# Altium PCB PCB_v1.PcbDoc (part 2 of 2)
Units mil, origin at the board's own origin, x right, y up, seen from the top; angles counter-clockwise.
Board outline 3011.81 x 2441 mil, 3 copper layers (Top Layer, Internal Plane 13, Bottom Layer); 107 components, 61 nets, 342 pads, 602 vias.
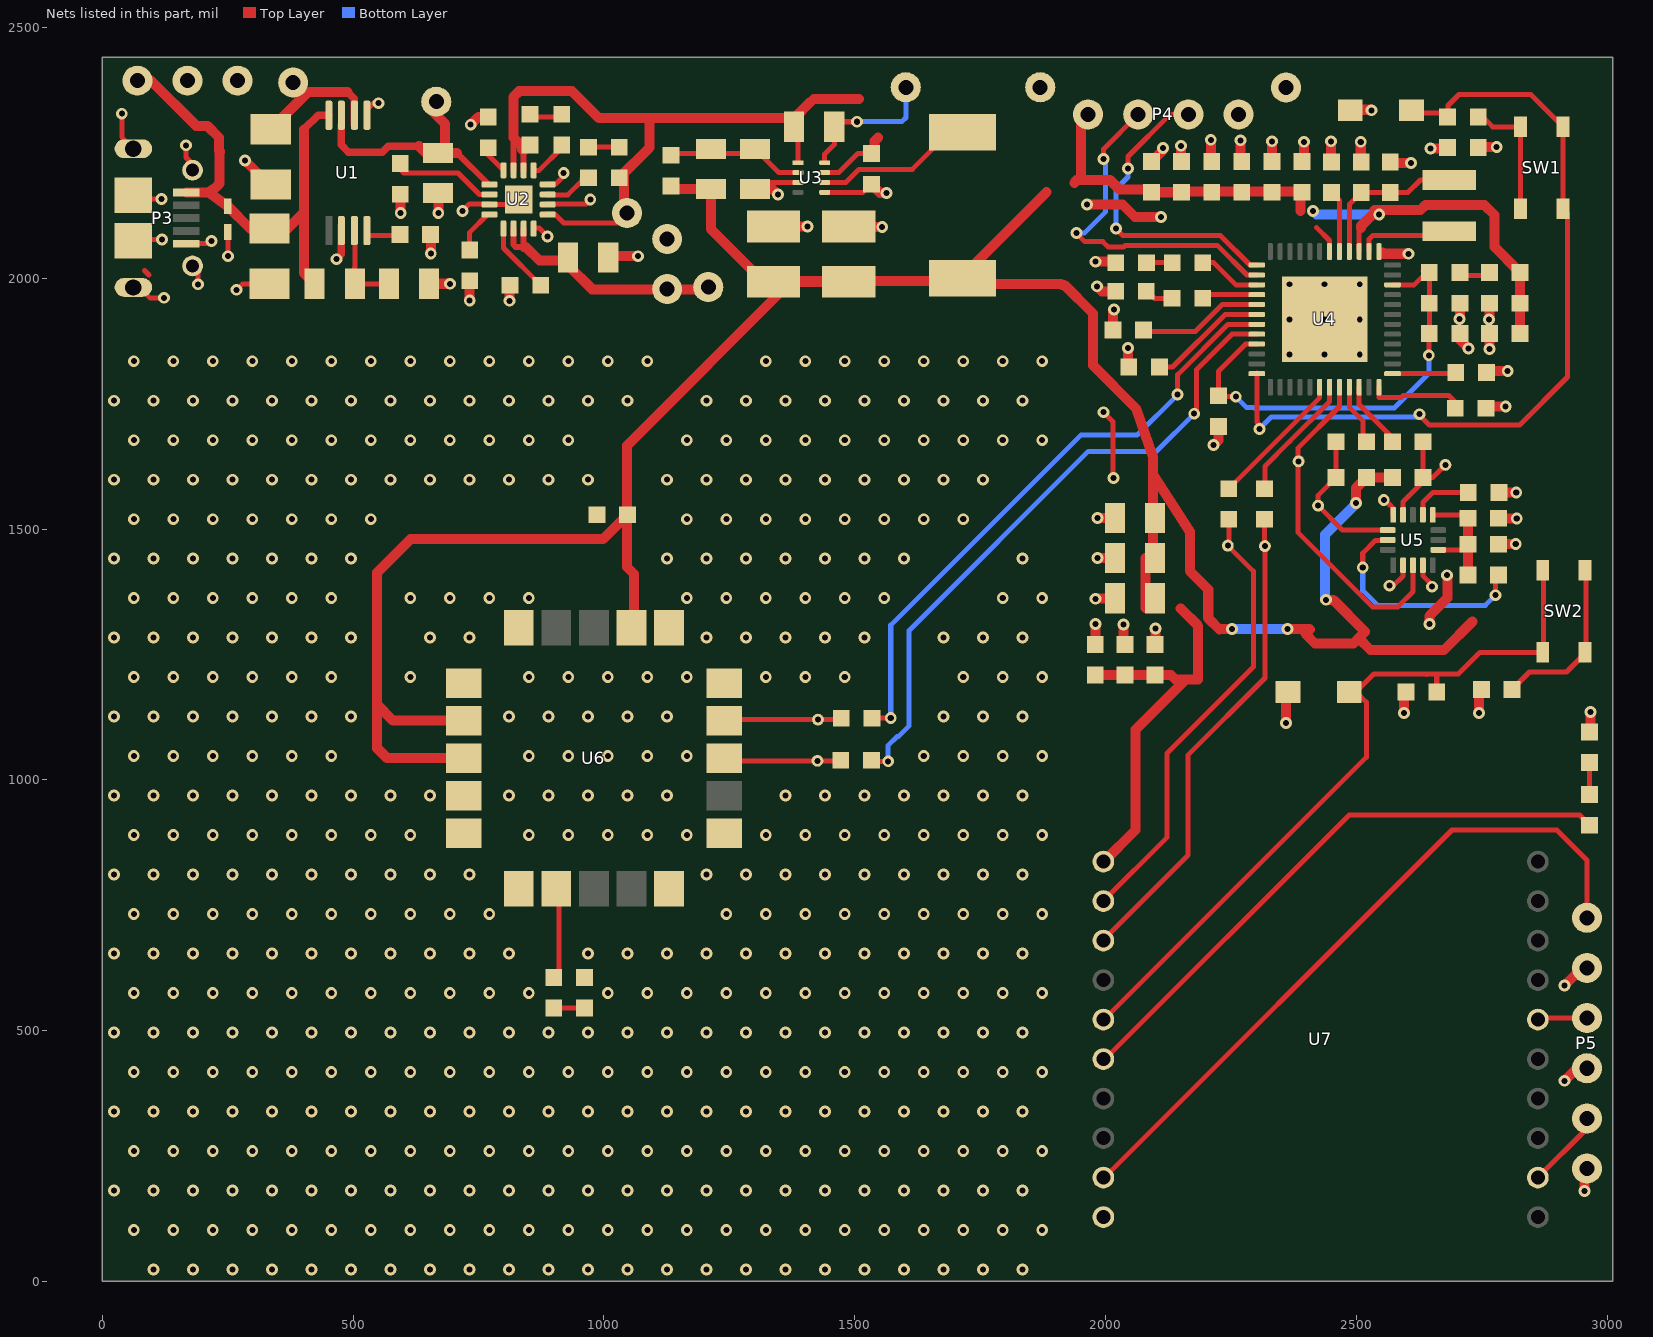
[diagram p3: the nets of this part, all layers, seen from the top]

## Part data
C1 C2: Package=1206, Supplier Part Number 1=311-1179-6-ND, Supplier 1=Digi-Key
C3 C4: Supplier Part Number 1=445-7617-1-ND, Supplier 1=Digi-Key
C5 C19 C25 C27: Supplier Part Number 1=399-3482-1-ND, Supplier 1=Digi-Key
C6: Supplier Part Number 1=490-1429-1-ND, Supplier 1=Digi-Key
C7 C8: Supplier Part Number 1=490-10560-1-ND, Supplier 1=Digi-Key
C9 C15 C21 C31: Supplier Part Number 1=490-10474-1-ND, Supplier 1=Digi-Key
C10 C20 C22: Supplier Part Number 1=490-6408-1-ND, Supplier 1=Digi-Key
C11 C12 C13 C14 C16 C17 C32: Supplier Part Number 1=490-8028-1-ND, Supplier 1=Digi-Key
C18 C23 C24 C26 C34: Supplier Part Number 1=490-8020-1-ND, Supplier 1=Digi-Key
C28 C29 C30: library part "0805C 47UF", Supplier Part Number 1=490-9949-1-ND, Supplier 1=Digi-Key
C33: Supplier Part Number 1=311-4039-1-ND, Supplier 1=Digi-Key
D1 D4: library part "0603 LEDR", Supplier Part Number 1=160-1181-6-ND, Supplier 1=Digi-Key
D2: library part "0603 LEDG", Supplier Part Number 1=160-1183-6-ND, Supplier 1=Digi-Key
D3 D5 D6: Supplier Part Number 1=160-1183-6-ND, Supplier 1=Digi-Key
E1: Supplier Part Number 1=1727-3838-1-ND, Supplier 1=Digi-Key
E2 E3: library part ESD_RESET, Supplier Part Number 1=F7701CT-ND, Supplier 1=Digi-Key
L1: Supplier Part Number 1=445-3878-1-ND, Supplier 1=Digi-Key
L2: Supplier Part Number 1=732-4484-1-ND, Supplier 1=Digi-Key
L3: Supplier Part Number 1=490-15954-1-ND, Supplier 1=Digi-Key
P1 P2: "Bat_connector"
P3: "USB - micro B USB 2.0 Receptacle Connector 5 Position Surface Mount, Right Angle; Through Hole", Package=None, Supplier Part Number 1=609-5379-6-ND, Availability=Unavailable, MF=Hirose, MP=ZX62D-B-5P8, Price=None, SnapEDA_Link=https://www.snapeda.com/parts/ZX62D-B-5P8/Hirose%20Electric%20Co%20Ltd/view-part/110243/?ref=snap, Supplier 1=Digi-Key
P4: library part 4pins_connector
R1 R2: Supplier Part Number 1=2019-RK73H2ATTD5101FCT-ND, Supplier 1=Digi-Key
R3 R6: Package=0603, Supplier Part Number 1=311-1.00KHRDKR-ND, Supplier 1=Digi-Key
R4 R5 R28 R31: Package=0603, Supplier Part Number 1=311-1.50KHRCT-ND, Supplier 1=Digi-Key
R7: Package=0603, Supplier Part Number 1=311-1.07KHRCT-ND, Supplier 1=Digi-Key
R8: Package=0603, Supplier Part Number 1=311-46.4KHRCT-ND, Supplier 1=Digi-Key
R9 R21 R22 R23: Package=0603, Supplier Part Number 1=311-10.0KHRCT-ND, Supplier 1=Digi-Key
R10 R12: Supplier Part Number 1=P100KCCT-ND, Supplier 1=Digi-Key
R11: Supplier Part Number 1=P453KCCT-ND, Supplier 1=Digi-Key
R13 R14: library part "0603R 3KR", Supplier Part Number 1=311-3.00KHRCT-ND, Supplier 1=Digi-Key
R15 R16 R17 R18: Package=0603
R19 R24 R25 R29 R30: Package=0603, Supplier Part Number 1=311-1.00HRCT-ND, Supplier 1=Digi-Key
R20 R32: Package=0603, Supplier Part Number 1=311-100HRCT-ND, Supplier 1=Digi-Key
R26 R27: Package=0603, Supplier Part Number 1=311-47.0HRDKR-ND, Supplier 1=Digi-Key
SW1 SW2: library part PTS810_SJM_250_SMTR_LFS, "Tactile Switch SPST-NO Top Actuated Surface Mount", Digikey part number=CKN10502CT-ND, Package=None, Availability=Unavailable, Digikey link=https://www.digikey.com/product-detail/en/c-k/PTS810-SJM-250-SMTR-LFS/CKN10502CT-ND/4176673, MF=C&K, MP="PTS810 SJM 250 SMTR LFS", Price=0.3, SnapEDA_Link=https://www.snapeda.com/parts/PTS810%20SJM%20250%20SMTR%20LFS/C%26K/view-part/522770/?ref=snap
T11 T12 T13 T14 T15: library part 1pin_header
U1: "OR Controller Source Selector Switch N-Channel 2:1 8-TSSOP", Package="TSSOP-8 Texas Instruments", Supplier Part Number 1=296-26917-5-ND, datasheet link=https://www.ti.com/lit/ds/symlink/tps2111a.pdf, Digikey link=https://www.digikey.com/product-detail/en/texas-instruments/TPS2110APWR/296-16935-1-ND/652789, MF="Texas Instruments", MP=TPS2110APWR, Price=2.34, SnapEDA_Link=https://www.snapeda.com/parts/TPS2111APW/Texas%20Instruments/view-part/299213/?ref=snap, Supplier 1=Digi-Key
U2: Package="16-VFQFN Exposed Pad", Supplier Part Number 1=296-24815-1-ND, datasheet link=http://www.ti.com/lit/ds/symlink/bq24079.pdf, Digikey link=https://www.digikey.com/product-detail/en/texas-instruments/BQ24079RGTR/296-24815-1-ND/2094655, MF="Texas Instruments", MP=BQ24079RGTR, Price=2.21, SnapEDA_Link=https://www.snapeda.com/parts/BQ24079TRGTR/Texas%20Instruments/view-part/144669/?ref=snap, Supplier 1=Digi-Key
U3: Package=8-VFDFN, Supplier Part Number 1=296-50424-1-ND, datasheet link=http://www.ti.com/lit/ds/symlink/tps62822.pdf, Digikey link=https://www.digikey.com/product-detail/en/texas-instruments/TPS62822DLCR/296-50424-1-ND/9685563, Digikey number=296-50424-1-ND, MF="Texas Instruments", MP=TPS62822DLCR, Supplier 1=Digi-Key
U4: library part EFM32PG12, Digikey part number=336-4419-ND, Package="48-VFQFN Exposed Pad", datasheet link=https://www.silabs.com/documents/public/data-sheets/efm32pg12-datasheet.pdf, Digikey link=https://www.digikey.com/product-detail/en/silicon-labs/EFM32PG12B500F1024GM48-C/336-4419-ND/8186199, MF="Silicon Labs", MP=EFM32PG12B500F1024GM48-C, Price=4.43, Supplier 1=Digi-Key, Supplier Part Number 1=336-4419-ND
U5: "Accelerometer X, Y, Z Axis , 2g, 4g, 8g 0.78Hz ~ 400Hz 16-QFN _3x3_", Package=16-VFQFN, Supplier Part Number 1=MMA8452QR1CT-ND, Availability=Unavailable, datasheet link=https://www.nxp.com/docs/en/data-sheet/MMA8451Q.pdf, Digikey link=https://www.digikey.com/product-detail/en/nxp-usa-inc/MMA8452QR1/MMA8452QR1TR-ND/2508917, MF="NXP Semiconductors", MP=MMA8452QR1, Price=1.147, SnapEDA_Link=https://www.snapeda.com/parts/MMA8452Q/NXP%20Semiconductors/view-part/4219708/?ref=snap, Supplier 1=Digi-Key
U6: "CAM-M8 RF Receiver BeiDou, GLONASS, GNSS, GPS 1.575GHz -167dBm On-Board, Chip Module", Package="20-SMD Module", Supplier Part Number 1=672-1054-1-ND, datasheet link=https://www.u-blox.com/sites/default/files/SAM-M8Q_HardwareIntegrationManual_%28UBX-16018358%29.pdf, Digi-Key_Part_Number=672-1054-1-ND, Digi-Key_Purchase_URL=https://www.digikey.com/product-detail/en/u-blox-america-inc/SAM-M8Q-0-10/672-1054-1-ND/7393573, MF="U-Blox America", MP=SAM-M8Q-0-10, Price=25, SnapEDA_Link=https://www.snapeda.com/parts/SAM-M8Q-0-10/U-Blox%20America/view-part/?ref=search&t=SAM-M8Q-0-10, Supplier 1=Digi-Key
U7: Digikey part number=602-2211-ND, Package="20-SMD Module", datasheet link=https://www.digi.com/pdf/ds_xbee3-cellular-cat1.pdf, Digikey link=https://www.digikey.com/product-detail/en/digi/XB3-C-A1-UT-001/602-2211-ND/8109033, MF=Digi, MP=XB3-C-A1-UT-001, Price=99

## Via types
v1: diameter 23.62, hole 12, Top Layer to Bottom Layer, tented both sides, 593 vias
v2: diameter 19.68, hole 11.81, Top Layer to Bottom Layer, 9 vias

## Nets (pads, with @x,y where several pads share a name; then routed paths per layer and width w, separated by ;. In a path a pad name is that pad's centre, name@x,y a point inside that pad or via, vN(x,y) a via of type N, cw(c..) or ccw(c..) an arc to the next point about the centre after c; other vN are vias at no path point)
3.3V: C6.2 C7.2 C8.2 C9.1 C10.1 C11.1 C12.1 C13.1 C14.1 C20.1 C21.1 C24.1 C25.1 C27.1 C28.2 C29.2 C30.2 C31.1 C32.1 C33.1 L1.2 L2.1 P4.1 R11.1 R21.2 R22.2 R23.1 T6.1 U4.39 U4.42 U5.1 U5.14 U6.2 U6.3 U6.17 U7.1 | length 7819.5
  Top Layer w10: 2421.26,2100.87 2446.85,2075.27 U4.42@2446.85,2054.53 ; U4.39@2505.91,2054.53 2505.91,2100.39 2509.22,2103.71 ; U5.1@2652.52,1528.31 C24.1@2715.69,1528.31 ; U5.14@2663.35,1458.43 C25.1@2711.18,1458.43
  Top Layer w20: U6.3@720.47,1043.11 568.11,1043.11 548.23,1062.99 548.23,1149.61 ; U6.2@720.47,1117.91 579.92,1117.91 548.23,1149.61 ; C27.1@1047.24,1528.54 C27.1@1046.26,1527.56 ; U6.17@1060.35,1302.95 1060.35,1410.47 1046.26,1424.56 C27.1@1046.26,1527.56 ; C6.2@1133.39,2187.49 1142.88,2178 R11.1@1213.39,2178 1213.39,2098 C7.2@1313.39,1998 ; C7.2@1378.97,1992.33 1457.33,1992.33 C8.2@1459.33,1994.33 ; C8.2@1463,1998 C8.2@1459.33,1994.33 ; 1623.26,1994.79 L1.2@1650.28,1994.79 ; L1.2@1650.74,1994.79 1650.28,1994.33 C8.2@1459.33,1994.33 ; 1882.57,2171.57 1699.43,1988.43 1911.57,1988.43 1913,1987 1917.84,1987 1975,1929.84 1975,1826.35 2061.19,1740.15 2095,1642 2095,1608.39 ; 1938.02,2190.18 1946,2198.16 1951.26,2198.16 1951.26,2312.68 P4.1@1965.35,2326.77 ; 1951.26,2196.19 2008.68,2196.19 2027.68,2177.19 2086.12,2177.19 C14.1@2091.85,2171.46 C13.1@2151.85,2171.46 ; U7.1@1996.49,836.49 2060,900 2060,1100 2160,1200 ; 1999.56,1209.01 C32.1@2039.06,1209.01 C31.1@2099.06,1209.01 2130.79,1209.01 2139.8,1200 2160,1200 ; C28.2@2080,1342.35 C29.2@2080,1442 ; C29.2@2095,1447 2095,1608.39 ; C13.1@2140.01,2172.91 C9.1@2380.01,2172.91 ; 2150.16,1341.84 2185,1307 2185,1200 2160,1200 ; v1(2252,1301) 2228.39,1301 2227.39,1300 2205,1322.39 2205,1379.42 2168.31,1416.11 2168.31,1495.08 2095,1608.39 ; v1(2363,1301) 2406.34,1301 2407.34,1300 2398.67,1291.33 2418,1272 2494.44,1272 2504.92,1282.48 ; 2388.48,2133.64 2388.48,2168.09 C9.1@2391.85,2171.46 ; v1(2440,1359) 2453.99,1359 2517.72,1295.28 2504.92,1282.48 ; v1(2499.87,1551.87) 2499.87,1582.19 R23.1@2520.65,1602.97 R22.2@2572.13,1602.97 ; 2509.22,2100.39 2509.22,2103.71 2536.69,2131.18 2536.69,2136.1 ; v1(2545.79,2127) 2536.69,2136.1 ; C24.1@2715.69,1528.31 C24.1@2722.64,1521.36 C25.1@2722.64,1469.89 R21.2@2722.64,1408.58 ; 2732.14,1316.14 2675,1259 2528.4,1259 2504.92,1282.48 ; C20.1@2826.61,1890.12 C21.1@2826.61,1950.12 2826.61,2011.14 2823.66,2014.09 L2.1@2824.1,2014.09 ; L2.1@2826.77,2011.42 L2.1@2824.1,2014.09 ; 548.23,1149.61 548.23,1413.39 614.67,1479.82 998.52,1479.82 C27.1@1046.26,1527.56 ; C27.1@1046.26,1527.56 1046.26,1666.26 1374.33,1994.33 C8.2@1459.33,1994.33 ; 2536.69,2136.1 2628.23,2136.1 2637.8,2145.67 2755.91,2145.67 2775.59,2125.98 2775.59,2062.6 L2.1@2824.1,2014.09
  Bottom Layer w20: v1(2252,1301) v1(2363,1301) ; v1(2414.05,2134.1) 2421.16,2127 v1(2545.79,2127) ; v1(2440,1359) 2438,1361 2438,1489 2499.87,1550.87 v1(2499.87,1551.87)
ACC_BYP: C26.1 U5.2 | length 123.8
  Top Layer w10: U5.2@2632.83,1528.31 2632.83,1552.92 2653.15,1573.23 2674.01,1573.23 2674.41,1572.83 C26.1@2723.43,1572.83
ACC_SA0: R21.1 U5.7 | length 463.2
  Top Layer w10: v1(2513,1423) 2513,1452 2538.19,1477.19 2562.03,1477.19 U5.7@2562.95,1478.12 ; v1(2777.56,1368.11) 2777.56,1402.48 R21.1@2783.66,1408.58
  Bottom Layer w10: v1(2513,1423) 2513,1378 2543.19,1347.81 2757.26,1347.81 v1(2777.56,1368.11)
ACC_SCL: R24.2 U4.22 | length 136.1
  Top Layer w10: U4.22@2505.91,1782.76 2505.91,1748.3 2572.13,1682.08 R24.2@2572.13,1674.09
ACC_SCL_T: R22.1 R24.1 T8.1 U5.4 | length 226.9
  Top Layer w10: U5.4@2593,1529 2593,1553.94 2633.15,1594.09 R22.1@2633.15,1602.97 ; U5.4@2593.46,1528.31 U5.4@2593.46,1538.41 ; R24.1@2633.15,1674.09 R22.1@2633.15,1602.97 ; T8.1@2677.89,1628 2652.86,1602.97 R22.1@2633.15,1602.97
ACC_SDA: R25.1 U4.21 | length 130.4
  Top Layer w10: U4.21@2486.22,1782.76 2486.22,1742.53 2513.15,1715.61 2513.15,1681.6 R25.1@2520.65,1674.09 R25.1@2520.65,1681.6
ACC_SDA_T: R23.2 R25.2 T9.1 U5.6 | length 301.4
  Top Layer w10: R25.2@2459.63,1674.09 R23.2@2459.63,1602.97 2424,1567.34 T9.1@2424,1546.59 2472.79,1497.8 U5.6@2562.95,1497.8
CTS: P5.5 U7.12 | length 158.4
  Top Layer w10: U7.12@2862.06,207.14 2960,305.08 P5.5@2960,325
DTR: P5.1 U7.9 | length 1391.8
  Top Layer w10: U7.9@1995.92,205 2690.92,900 2900,900 2960,840 P5.1@2960,725
FALL_INT: T10.1 U4.20 U5.11 | length 681.1
  Top Layer w10: U4.20@2466.54,1782.76 2466.54,1744.25 2383.6,1661.32 2383.6,1493.4 2532,1345 2583,1345 2613.15,1375.15 U5.11@2613.15,1427.92 U5.11@2612.37,1427.14
GND: C1.1 C2.1 C3.1 C4.1 C5.1 C7.1 C8.1 C9.2 C10.2 C11.2 C12.2 C13.2 C14.2 C15.2 C16.2 C17.2 C18.2 C19.2 C20.2 C21.2 C22.2 C23.2 C24.2 C25.2 C26.2 C27.2 C28.1 C29.1 C30.1 C31.2 C32.2 C33.2 C34.2 D3.2 D4.2 D5.2 D6.2 E1.1 E2.2 E3.2 P1.2 P2.2 P3.5 P3.S1 P3.S2 P3.S3 P3.S4 P3.S5 P3.S6 P4.4 P5.2 P5.4 P5.6 R2.1 R3.1 R6.1 R7.1 R8.1 R9.1 R12.2 R15.2 R16.2 R17.2 R18.2 R20.2 R32.2 T7.1 U1.2 U1.5 U2.4 U2.6 U2.8 U2.15 U2.17 U3.3 U3.5 U4.0 U4.37 U5.5 U5.10 U5.12 U6.1 U6.4 U6.5 U6.6 U6.10 U6.11 U6.15 U6.16 U6.20 U7.10 | length 4024.5
  Top Layer w10: v1(39,2328) 39,2281.33 P3.S3@62.05,2258.29 ; P3.S6@62.05,1993.82 94.87,1961 v1(123,1961) ; P3.S5@62.05,2086.84 71.88,2077 v1(119,2077) ; P3.S4@62.05,2177.39 81.43,2158 v1(118,2158) ; 84.45,2015.33 93.24,2006.54 ; v1(167,2265) 167,2240.74 P3.S1@180.16,2227.58 ; P3.5@167.36,2068.82 212.82,2068.82 v1(218,2074) ; v1(191,1988) P3.S2@191,2025.8 ; E1.1@250.21,2092.41 251,2091.62 v1(251,2044) ; v1(268,1977) 280,1989 C1.1@333.82,1989 ; U1.5@527.69,2305.91 U1.5@527.69,2325 527.69,2335.69 541,2349 v1(551,2349) ; v1@669.61,2130.39 v1(670,2130) ; v1(718,2134) 732,2148 771,2148 U2.15@772,2147 820,2147 U2.17@830,2157 ; U2.4@860,2100 871,2100 v1(888,2083) ; U2.6@885,2148 965.29,2148 973,2155.71 v1(973,2157) ; U2.8@885,2188 904,2188 920,2204 v1(920,2210) ; R12.2@1313.39,2178 1326.34,2190.95 U3.3@1387.13,2190.95 ; C7.1@1338.42,2103.12 C7.1@1338.54,2103 ; U3.5@1440.28,2171.26 1517.17,2171.26 C5.1@1533.39,2187.49 ; v1(1980,1361) v1@1981,1362 ; v1(1996,1733) 2015,1714 v1@2015,1602 ; D3.2@2020.64,2031.09 D3.2@2022,2032.46 ; C32.2@2036,1273.09 C32.2@2039.06,1270.03 ; R17.2@2045,1824.45 R17.2@2046.49,1822.97 ; C31.2@2099.06,1270.03 C31.2@2100,1270.97 ; C22.2@2450,2232.64 C22.2@2450.79,2231.86 ; C19.2@2509,2232.7 C19.2@2509.84,2231.86 ; 2565.13,1549.87 2573.78,1541.22 U5.5@2573.78,1528.31 ; v1(2566,1387) 2574,1387 2593.46,1406.46 U5.10@2593.46,1427.92 ; U5.12@2632.83,1427.92 2632.83,1407.17 2651,1389 v1(2651,1385) ; C23.2@2680.09,2259 C23.2@2681.79,2260.7 ; v1(2706,1919) v1@2706.61,1919.61 ; C15.2@2706.61,1877.39 C15.2@2706.61,1890.12 ; R20.2@2743.09,2260.7 R20.2@2744.39,2262 ; v1(2765,1918) v1@2765.59,1918.59 ; v1@2765.59,1859.41 v1(2766,1859) ; R15.2@2765.7,1818.03 R15.2@2768.59,1815 ; P5.4@2940,425 P5.4@2960,425 ; P5.2@2950,625 P5.2@2960,625 ; P3.S2@191,2025.8 191,2028.32 180.16,2039.16 180.16,2036.64 P3.S2@191,2025.8
  Top Layer w15: v1(467,2038) 476.69,2047.69 U1.2@476.69,2095 U1.2@476.69,2106
  Top Layer w20: v1(284.62,2235) C2.1@332.08,2187.54 ; R8.1@594.26,2167.49 596,2165.74 593,2162.74 595,2160.74 v1(595,2130) ; R2.1@651.56,1989 v1(693,1989) ; v1(655,2049) 655.83,2049.83 R3.1@655.83,2087 ; C3.1@669.61,2170 v1(670,2130) ; R6.1@726.86,2000.79 R6.1@732.61,1995.05 v1(732.61,1955.61) ; v1(734.57,2306.07) 749.77,2321.27 R7.1@769.46,2321.27 ; v1(812.07,1955) 812.07,1985.2 R9.1@814.17,1987.3 ; C4.1@1008.83,2041.31 1011.52,2044 v1(1068,2044) ; R12.2@1301.4,2178 1313.39,2178 1336,2178 v1(1347,2167) ; C7.1@1338.54,2103 v1(1406,2103) ; C8.1@1488.42,2103.12 1510.95,2103.12 1519.02,2111.19 1528.21,2102 v1(1555,2102) ; C5.1@1533.39,2187.49 1550.64,2170.24 v1(1563.32,2170.24) ; v1(1963,2147) 2034.13,2147 2059.13,2122 v1(2111,2122) ; C33.2@1980,1270.03 v1(1980,1311) ; v1(1980,2033) 2015.46,2033 2018.46,2036 D3.2@2022,2032.46 ; v1@1981,1362 C28.1@2019,1362 ; v1(1983,1984) 1993,1974 D4.2@2020.49,1974 ; v1(1984,1442) C29.1@2019,1442 ; v1(1984,1522) C30.1@2019,1522 ; R18.2@2014.98,1897 2014.98,1937.02 2015.95,1938 v1(2017,1938) ; C32.2@2036,1273.09 v1(2036,1310) ; R17.2@2045,1824.45 v1(2045,1861) ; C14.2@2091.85,2232.48 2092.02,2232.31 2115,2255.29 v1(2115,2260) ; C31.2@2100,1270.97 v1(2100,1302) ; v1(2151,2264) 2151,2233.33 C13.2@2151.85,2232.48 C13.2@2151.85,2232.31 ; v1(2210,2276) 2210,2234.33 C12.2@2211.85,2232.48 ; v1(2215.55,1667.32) 2225.16,1676.93 C17.2@2225.16,1704.72 ; v1(2269,2275) 2269,2235.33 C11.2@2271.85,2232.48 ; C10.2@2331.85,2232.48 2332,2232.63 v1(2332,2273) ; v1(2360,1113) E3.2@2360,1167 ; C9.2@2391.85,2232.48 C9.2@2392.47,2231.86 ; v1(2396,2272) C9.2@2396,2231.86 ; C22.2@2450,2232.64 v1(2450,2273) ; E2.2@2487,2335.9 v1@2530.1,2335.9 ; C19.2@2509,2232.7 v1(2509,2272) ; 2552.06,2051.18 2554.42,2048.82 v1(2603.88,2048.82) ; C18.2@2567.91,2231.86 2566.06,2230 v1(2609,2230) ; v1(2595,1133) 2595,1170.51 C34.2@2599.49,1175 ; v1(2646,1311) 2646,1327 2682,1363 2682,1406.83 v1(2680.83,1408) ; v1(2648,2259) C23.2@2680.09,2259 ; C15.2@2706.61,1877.39 v1(2724,1860) ; v1@2706.61,1919.61 C16.2@2706.61,1950.12 ; R20.2@2744.39,2262 v1(2780,2262) ; R32.2@2744.49,1175 R32.2@2745,1175.51 ; v1(2745,1133) R32.2@2745,1175.51 ; R32.2@2745,1180 R32.2@2745,1175.51 ; R32.2@2749.49,1180 R32.2@2745,1175.51 ; R16.2@2752.35,1747.16 2755.51,1744 v1(2798,1744) ; v1@2765.59,1859.41 C20.2@2765.59,1890.12 ; v1@2765.59,1918.59 C21.2@2765.59,1950.12 ; R15.2@2768.59,1815 v1(2802,1815) ; C25.2@2783.66,1469.89 v1(2818,1469.89) ; C24.2@2783.66,1521.36 v1(2820,1521.36) ; C26.2@2784.45,1572.83 2784.61,1573 v1(2819,1573) ; v1(2915,400) P5.4@2940,425 ; v1(2915,590) P5.2@2950,625 ; v1(2955,180) 2955,220 P5.6@2960,225 ; D6.2@2966.86,1095.51 v1(2966.86,1135) ; C9.2@2392.47,2231.86 2396,2228.33 C9.2@2396,2231.86 ; C9.2@2392.47,2231.86 C9.2@2396,2231.86
  other v1: 102.36,23.62 181.1,23.62 259.84,23.62 338.58,23.62 417.32,23.62 496.06,23.62 574.8,23.62 653.54,23.62 732.28,23.62 811.02,23.62 889.76,23.62 968.51,23.62 1047.25,23.62 1125.99,23.62 1204.73,23.62 1283.47,23.62 1362.21,23.62 1440.95,23.62 1519.69,23.62 1598.43,23.62 1677.17,23.62 1755.91,23.62 1834.65,23.62 62.99,102.36 141.73,102.36 220.47,102.36 299.21,102.36 377.95,102.36 456.69,102.36 535.43,102.36 614.17,102.36 692.91,102.36 771.65,102.36 850.39,102.36 929.13,102.36 1007.88,102.36 1086.62,102.36 1165.36,102.36 1244.1,102.36 1322.84,102.36 1401.58,102.36 1480.32,102.36 1559.06,102.36 1637.8,102.36 1716.54,102.36 1795.28,102.36 1874.02,102.36 23.62,181.1 102.36,181.1 181.1,181.1 259.84,181.1 338.58,181.1 417.32,181.1 496.06,181.1 574.8,181.1 653.54,181.1 732.28,181.1 811.02,181.1 889.76,181.1 968.51,181.1 1047.25,181.1 1125.99,181.1 1204.73,181.1 1283.47,181.1 1362.21,181.1 1440.95,181.1 1519.69,181.1 1598.43,181.1 1677.17,181.1 1755.91,181.1 1834.65,181.1 62.99,259.84 141.73,259.84 220.47,259.84 299.21,259.84 377.95,259.84 456.69,259.84 535.43,259.84 614.17,259.84 692.91,259.84 771.65,259.84 850.39,259.84 929.13,259.84 1007.88,259.84 1086.62,259.84 1165.36,259.84 1244.1,259.84 1322.84,259.84 1401.58,259.84 1480.32,259.84 1559.06,259.84 1637.8,259.84 1716.54,259.84 1795.28,259.84 1874.02,259.84 23.62,338.58 102.36,338.58 181.1,338.58 259.84,338.58 338.58,338.58 417.32,338.58 496.06,338.58 574.8,338.58 653.54,338.58 732.28,338.58 811.02,338.58 889.76,338.58 968.51,338.58 1047.25,338.58 1125.99,338.58 1204.73,338.58 1283.47,338.58 1362.21,338.58 1440.95,338.58 1519.69,338.58 1598.43,338.58 1677.17,338.58 1755.91,338.58 1834.65,338.58 62.99,417.32 141.73,417.32 220.47,417.32 299.21,417.32 377.95,417.32 456.69,417.32 535.43,417.32 614.17,417.32 692.91,417.32 771.65,417.32 850.39,417.32 929.13,417.32 1007.88,417.32 1086.62,417.32 1165.36,417.32 1244.1,417.32 1322.84,417.32 1401.58,417.32 1480.32,417.32 1559.06,417.32 1637.8,417.32 1716.54,417.32 1795.28,417.32 1874.02,417.32 23.62,496.06 102.36,496.06 181.1,496.06 259.84,496.06 338.58,496.06 417.32,496.06 496.06,496.06 574.8,496.06 653.54,496.06 732.28,496.06 811.02,496.06 889.76,496.06 968.51,496.06 1047.25,496.06 1125.99,496.06 1204.73,496.06 1283.47,496.06 1362.21,496.06 1440.95,496.06 1519.69,496.06 1598.43,496.06 1677.17,496.06 1755.91,496.06 1834.65,496.06 62.99,574.8 141.73,574.8 220.47,574.8 299.21,574.8 377.95,574.8 456.69,574.8 535.43,574.8 614.17,574.8 692.91,574.8 771.65,574.8 850.39,574.8 1007.88,574.8 1086.62,574.8 1165.36,574.8 1244.1,574.8 1322.84,574.8 1401.58,574.8 1480.32,574.8 1559.06,574.8 1637.8,574.8 1716.54,574.8 1795.28,574.8 1874.02,574.8 23.62,653.54 102.36,653.54 181.1,653.54 259.84,653.54 338.58,653.54 417.32,653.54 496.06,653.54 574.8,653.54 653.54,653.54 732.28,653.54 811.02,653.54 968.51,653.54 1047.25,653.54 1125.99,653.54 1204.73,653.54 1283.47,653.54 1362.21,653.54 1440.95,653.54 1519.69,653.54 1598.43,653.54 1677.17,653.54 1755.91,653.54 1834.65,653.54 62.99,732.28 141.73,732.28 220.47,732.28 299.21,732.28 377.95,732.28 456.69,732.28 535.43,732.28 614.17,732.28 692.91,732.28 771.65,732.28 1244.1,732.28 1322.84,732.28 1401.58,732.28 1480.32,732.28 1559.06,732.28 1637.8,732.28 1716.54,732.28 1795.28,732.28 1874.02,732.28 23.62,811.02 102.36,811.02 181.1,811.02 259.84,811.02 338.58,811.02 417.32,811.02 496.06,811.02 574.8,811.02 653.54,811.02 732.28,811.02 1204.73,811.02 1283.47,811.02 1362.21,811.02 1440.95,811.02 1519.69,811.02 1598.43,811.02 1677.17,811.02 1755.91,811.02 1834.65,811.02 62.99,889.76 141.73,889.76 220.47,889.76 299.21,889.76 377.95,889.76 456.69,889.76 535.43,889.76 614.17,889.76 850.39,889.76 929.13,889.76 1007.88,889.76 1086.62,889.76 1165.36,889.76 1322.84,889.76 1401.58,889.76 1480.32,889.76 1559.06,889.76 1637.8,889.76 1716.54,889.76 1795.28,889.76 1874.02,889.76 23.62,968.51 102.36,968.51 181.1,968.51 259.84,968.51 338.58,968.51 417.32,968.51 496.06,968.51 574.8,968.51 653.54,968.51 811.02,968.51 889.76,968.51 968.51,968.51 1047.25,968.51 1125.99,968.51 1362.21,968.51 1440.95,968.51 1519.69,968.51 1598.43,968.51 1677.17,968.51 1755.91,968.51 1834.65,968.51 62.99,1047.25 141.73,1047.25 220.47,1047.25 299.21,1047.25 377.95,1047.25 456.69,1047.25 850.39,1047.25 929.13,1047.25 1007.88,1047.25 1086.62,1047.25 1165.36,1047.25 1637.8,1047.25 1716.54,1047.25 1795.28,1047.25 1874.02,1047.25 23.62,1125.99 102.36,1125.99 181.1,1125.99 259.84,1125.99 338.58,1125.99 417.32,1125.99 496.06,1125.99 811.02,1125.99 889.76,1125.99 968.51,1125.99 1047.25,1125.99 1125.99,1125.99 1677.17,1125.99 1755.91,1125.99 1834.65,1125.99 62.99,1204.73 141.73,1204.73 220.47,1204.73 299.21,1204.73 377.95,1204.73 456.69,1204.73 614.17,1204.73 850.39,1204.73 929.13,1204.73 1007.88,1204.73 1086.62,1204.73 1165.36,1204.73 1322.84,1204.73 1401.58,1204.73 1480.32,1204.73 1716.54,1204.73 1795.28,1204.73 1874.02,1204.73 23.62,1283.47 102.36,1283.47 181.1,1283.47 259.84,1283.47 338.58,1283.47 417.32,1283.47 496.06,1283.47 653.54,1283.47 732.28,1283.47 1204.73,1283.47 1283.47,1283.47 1362.21,1283.47 1440.95,1283.47 1519.69,1283.47 1677.17,1283.47 1755.91,1283.47 1834.65,1283.47 62.99,1362.21 141.73,1362.21 220.47,1362.21 299.21,1362.21 377.95,1362.21 456.69,1362.21 614.17,1362.21 692.91,1362.21 771.65,1362.21 850.39,1362.21 1165.36,1362.21 1244.1,1362.21 1322.84,1362.21 1401.58,1362.21 1480.32,1362.21 1559.06,1362.21 1795.28,1362.21 1874.02,1362.21 23.62,1440.95 102.36,1440.95 181.1,1440.95 259.84,1440.95 338.58,1440.95 417.32,1440.95 496.06,1440.95 1125.99,1440.95 1204.73,1440.95 1283.47,1440.95 1362.21,1440.95 1440.95,1440.95 1519.69,1440.95 1598.43,1440.95 1834.65,1440.95 62.99,1519.69 141.73,1519.69 220.47,1519.69 299.21,1519.69 377.95,1519.69 456.69,1519.69 535.43,1519.69 1165.36,1519.69 1244.1,1519.69 1322.84,1519.69 1401.58,1519.69 1480.32,1519.69 1559.06,1519.69 1637.8,1519.69 1716.54,1519.69 2555,1558 23.62,1598.43 102.36,1598.43 181.1,1598.43 259.84,1598.43 338.58,1598.43 417.32,1598.43 496.06,1598.43 574.8,1598.43 653.54,1598.43 732.28,1598.43 811.02,1598.43 889.76,1598.43 968.51,1598.43 1125.99,1598.43 1204.73,1598.43 1283.47,1598.43 1362.21,1598.43 1440.95,1598.43 1519.69,1598.43 1598.43,1598.43 1677.17,1598.43 1755.91,1598.43 2016,1602 62.99,1677.17 141.73,1677.17 220.47,1677.17 299.21,1677.17 377.95,1677.17 456.69,1677.17 535.43,1677.17 614.17,1677.17 692.91,1677.17 771.65,1677.17 850.39,1677.17 929.13,1677.17 1165.36,1677.17 1244.1,1677.17 1322.84,1677.17 1401.58,1677.17 1480.32,1677.17 1559.06,1677.17 1637.8,1677.17 1716.54,1677.17 1795.28,1677.17 1874.02,1677.17 23.62,1755.91 102.36,1755.91 181.1,1755.91 259.84,1755.91 338.58,1755.91 417.32,1755.91 496.06,1755.91 574.8,1755.91 653.54,1755.91 732.28,1755.91 811.02,1755.91 889.76,1755.91 968.51,1755.91 1047.25,1755.91 1204.73,1755.91 1283.47,1755.91 1362.21,1755.91 1440.95,1755.91 1519.69,1755.91 1598.43,1755.91 1677.17,1755.91 1755.91,1755.91 1834.65,1755.91 62.99,1834.65 141.73,1834.65 220.47,1834.65 299.21,1834.65 377.95,1834.65 456.69,1834.65 535.43,1834.65 614.17,1834.65 692.91,1834.65 771.65,1834.65 850.39,1834.65 929.13,1834.65 1007.88,1834.65 1086.62,1834.65 1322.84,1834.65 1401.58,1834.65 1480.32,1834.65 1559.06,1834.65 1637.8,1834.65 1716.54,1834.65 1795.28,1834.65 1874.02,1834.65 2530.1,2334.9
  other v2: 2367.01,1848 2437.01,1848 2507.01,1848 2367.01,1918 2437.01,1918 2507.01,1918 2367.01,1988 2437.01,1988 2507.01,1988
GPS_RX: R27.1 U4.7 | length 1224.2
  Top Layer w10: R27.1@1534.54,1123 v1(1572,1123) ; v1(2144,1768) 2144,1807.66 2244.5,1908.16 U4.7@2301.77,1908.16
  Bottom Layer w10: v1(1572,1123) 1572,1308.22 1950.89,1687.11 2063.11,1687.11 v1(2144,1768)
GPS_RX_T: R27.2 T12.1 U6.14 | length 230.2
  Top Layer w10: U6.14@1245.39,1117.91 1247.48,1120 T12.1@1426.96,1120 1470.51,1120 R27.2@1473.51,1123
GPS_TX: R26.1 U4.8 | length 1300.3
  Top Layer w10: R26.1@1533.51,1039 1535.51,1037 v1(1567,1037) ; v1(2177,1730) 2182,1735 2182,1818 2252.47,1888.47 U4.8@2301.77,1888.47
  Bottom Layer w10: v1(1567,1037) 1567,1068.73 1584.46,1086.19 1587.25,1086.19 1608.81,1107.75 1608.81,1297.79 1966.02,1655 2102,1655 v1(2177,1730)
GPS_TX_T: R26.2 T11.1 U6.13 | length 234.9
  Top Layer w10: U6.13@1240.16,1043.11 1245.27,1038 T11.1@1425.93,1038 1471.49,1038 R26.2@1472.49,1039
ID_ILIM: R3.2 U1.4 | length 67.1
  Top Layer w10: U1.4@528.69,2085.43 R3.2@595.81,2085.43
ID_VSNS: R1.1 R2.2 U1.3 | length 156.2
  Top Layer w10: U1.3@502.69,2075.91 503.81,2074.79 503.81,2022.75 502.69,2021.63 502.69,1989.83 R1.1@503.53,1988.98 R2.2@571.54,1988.98
LTE_RSSI: R31.1 U7.6 | length 1180.3
  Top Layer w10: U7.6@1995.92,440 2485.92,930 2945,930 R31.1@2965,910
LTE_RX: R30.1 U4.19 | length 263.2
  Top Layer w10: R30.1@2313,1575 2317.96,1579.96 2317.96,1625.04 2367.72,1674.81 2446.85,1753.94 U4.19@2446.85,1782.76
LTE_RX_T: R30.2 T14.1 U7.3 | length 973.3
  Top Layer w10: U7.3@1995.25,680.25 2165,850 2165,1050 2318,1203 T14.1@2318,1466 2317.13,1466.87 R30.2@2317.13,1519.49
LTE_TX: R29.1 U4.18 | length 277.3
  Top Layer w10: R29.1@2246,1580.51 2246,1580.65 2427.17,1761.81 U4.18@2427.17,1782.76
LTE_TX_T: R29.2 T13.1 U7.2 | length 906.9
  Top Layer w10: U7.2@1995.92,758.32 2122.35,884.75 2122.35,1052.51 2294.84,1225 2294.84,1416.16 T13.1@2244,1467 2246,1469 R29.2@2246,1519.49
MCU_AVDD: C15.1 C16.1 C17.1 R19.2 U4.9 U4.34 | length 898.6
  Top Layer w10: v1(2259.84,1763.78) 2227.13,1763.78 C17.1@2225.16,1765.75 2225.16,1814.22 2279.73,1868.79 U4.9@2301.77,1868.79 ; U4.34@2572.24,1986.9 2615.44,1986.9 2642.64,2014.09 R19.2@2633.15,2014.09 ; v1(2644.69,1846.46) 2644.69,1889.21 C15.1@2645.59,1890.12 2645.67,1890.2 R19.2@2645.67,2011.42
  Bottom Layer w10: v1(2259.84,1763.78) 2281.5,1742.13 2295.28,1742.13 2295.98,1741.43 2576.07,1741.43 2644.69,1810.04 v1(2644.69,1846.46)
MCU_DE: C22.1 U4.41 | length 122.8
  Top Layer w10: C22.1@2450.79,2170.83 2466.54,2155.08 U4.41@2466.54,2054.53
MCU_DVDD: C18.1 C19.1 L3.2 U4.40 | length 311.9
  Top Layer w10: U4.40@2486.22,2054.53 2486.22,2147.21 C19.1@2509.84,2170.83 C18.1@2567.91,2170.83 2602.92,2170.83 2627.95,2195.87 L3.2@2685.29,2195.87
MCU_GSW: L3.1 U4.38 | length 189.4
  Top Layer w10: U4.38@2525.59,2054.53 2525.59,2077.76 2533.46,2085.63 2677.41,2085.63 L3.1@2685.29,2093.5
MCU_P3: R13.2 U4.3 | length 125.9
  Top Layer w10: R13.2@2194.16,2031.09 2215.91,2031.09 2260.1,1986.9 U4.3@2301.77,1986.9
MCU_P4: R14.2 U4.4 | length 113.6
  Top Layer w10: R14.2@2194.01,1959.97 2201.26,1967.21 U4.4@2301.77,1967.21 ; R14.2@2196.16,1970.54 R14.2@2198.19,1968.5
MCU_P5: R18.1 U4.5 | length 247.9
  Top Layer w10: R18.1@2076,1894.09 2179.53,1894.09 2232.96,1947.53 U4.5@2301.77,1947.53
MCU_P6: R17.1 U4.6 | length 237.7
  Top Layer w10: R17.1@2107.51,1822.97 2133.86,1822.97 2238.73,1927.84 U4.6@2301.77,1927.84
MCU_P24: R16.1 U4.24 | length 197
  Top Layer w10: U4.24@2545.28,1782.76 2545.28,1762.28 2589.28,1762.28 2593,1766 2684.88,1766 2703.68,1747.2 R16.1@2697.49,1741
MCU_P25: R15.1 U4.25 | length 129.3
  Top Layer w10: U4.25@2572.24,1809.73 2572.33,1809.65 R15.1@2691.54,1809.65 ; R15.1@2692.91,1811.02 R15.1@2691.54,1809.65 ; R15.1@2698.49,1812.13 2696.01,1809.65 R15.1@2691.54,1809.65
MCU_RESET: C23.1 E2.1 SW1.1 SW1.2 U4.12 | length 1642.9
  Top Layer w10: U4.12@2301.77,1811.02 U4.12@2301.77,1809.73 2301.77,1713.39 2307.09,1708.07 v1(2307.09,1699.8) ; E2.1@2616.14,2318.9 2626.97,2329.72 2682.79,2329.72 2682.79,2344.21 2704.72,2366.14 2848.14,2366.14 SW1.1@2912.4,2301.88 SW1.2@2912.4,2138.5 2921.26,2129.64 2921.26,1803.15 2825.3,1707.19 2646.13,1707.19 2624.32,1729 v1(2626,1729)
  Bottom Layer w10: v1(2307.09,1699.8) 2330.71,1723.43 v1@2626,1723.43
NetC6_1: C6.1 R11.2 R12.1 U3.2 | length 277.3
  Top Layer w10: C6.1@1133.39,2248.51 1291.92,2248.51 R12.1@1301.4,2258 1348.77,2210.63 U3.2@1387.13,2210.63
NetC34_1: C34.1 E3.1 SW2.1 SW2.2 U7.5 | length 1484.9
  Top Layer w10: U7.5@1996.51,521.51 2520,1045 2520,1155 2499.5,1175.5 2535.02,1211.02 2641.02,1211.02 ; 2640.51,1210.51 2641.02,1211.02 ; C34.1@2660.51,1175 2660.51,1210.51 ; SW2.2@2873,1417.36 2873,1253.97 2746.54,1253.97 2703.59,1211.02 2641.02,1211.02
NetD1_1: D1.1 R4.2 | length 61.3
  Top Layer w10: R4.2@854.38,2321.27 D1.1@915.68,2321.27
NetD1_2: D1.2 U2.9 | length 74.1
  Top Layer w10: U2.9@860,2215 871.18,2215 D1.2@915.68,2259.5
NetD2_1: D2.1 R5.2 | length 61.3
  Top Layer w10: D2.1@969.46,2261.27 R5.2@1030.76,2261.27
NetD2_2: D2.2 U2.7 | length 106.3
  Top Layer w10: U2.7@900.73,2168 885,2168 886.84,2166.16 928.22,2166.16 956.81,2194.75 956.81,2198.58 D2.2@958.47,2200.24
NetD3_1: D3.1 R13.1 | length 51.5
  Top Layer w10: D3.1@2081.66,2031.09 R13.1@2133.14,2031.09
NetD4_1: D4.1 R14.1 | length 55.2
  Top Layer w10: D4.1@2083.66,1974.09 2097.79,1959.97 R14.1@2132.99,1959.97
NetD5_1: D5.1 R28.2 | length 61.3
  Top Layer w10: R28.2@900,544.89 D5.1@961.3,544.89
NetD6_1: D6.1 R31.2 | length 64
  Top Layer w10: R31.2@2965,970.51 D6.1@2965,1034.49
NetL1_1: L1.1 U3.6 | length 299.9
  Top Layer w10: U3.6@1440.28,2190.95 1482.57,2190.95 1508.84,2217.22 1614.86,2217.22 1683.77,2286.13 L1.1@1700.79,2286.13
NetL2_2: L2.2 R19.1 | length 59
  Top Layer w10: R19.1@2706.61,2005 L2.2@2765.59,2005
NetR9_2: R9.2 U2.1 | length 143.5
  Top Layer w10: U2.1@800,2099 800,2060.27 R9.2@874.08,1986.19
NetR20_1: R20.1 SW1.3 SW1.4 | length 258.6
  Top Layer w10: R20.1@2744.09,2329.72 2771.94,2301.88 SW1.3@2827.76,2301.88 SW1.4@2827.76,2138.5
NetR28_1: R28.1 U6.7 | length 181.8
  Top Layer w10: R28.1@900,605.91 910.75,616.66 U6.7@910.75,783.27
NetR32_1: R32.1 SW2.3 SW2.4 | length 341.5
  Top Layer w10: R32.1@2810.51,1180 2845.51,1215 2919,1215 2958,1254 SW2.4@2958,1417.36
PM_ILIM: R7.2 U2.12 | length 57.9
  Top Layer w10: R7.2@769.46,2260.24 769.46,2245.54 U2.12@800,2215
PM_ISET: R6.2 U2.16 | length 89.7
  Top Layer w10: R6.2@732.61,2056.07 732.61,2091.39 732.5,2091.5 768,2127 U2.16@772,2127
PM_TMR: R8.2 U2.14 | length 218.8
  Top Layer w10: R8.2@594.26,2228.51 R8.2@594.26,2216.7 ; R8.2@602.88,2216.7 R8.2@594.26,2216.7 ; U2.14@772,2167 752.27,2167 709.27,2210 600.96,2210 R8.2@594.26,2216.7
RTS: P5.3 U7.16 | length 99.1
  Top Layer w10: U7.16@2862.06,522.1 2864.96,525 P5.3@2960,525
SWCLK: P4.3 U4.1 | length 621.4
  Top Layer w10: v1(2021,2099) 2034.81,2085.19 2229.17,2085.19 2288.09,2026.27 U4.1@2301.77,2026.27 ; v1(2045,2219) 2045,2242.78 2128.99,2326.77 P4.3@2165.35,2326.77
  Bottom Layer w10: v1(2021,2099) 2021,2174 2025,2178 2023,2180 2045,2202 v1(2045,2219)
SWDIO: P4.2 U4.2 | length 697.1
  Top Layer w10: v1(1942,2090) 1959,2073 1994.94,2073 2005.75,2062.19 2036.25,2062.19 2039.06,2065 2223.9,2065 2282.32,2006.58 U4.2@2301.77,2006.58 ; v1(1996,2238) 1996,2257.42 P4.2@2065.35,2326.77
  Bottom Layer w10: v1(1942,2090) 1958.06,2090 1999.81,2131.75 1999.81,2234.19 v1(1996,2238)
V_BAT: C4.2 P1.1 T1.1 U2.2 U2.3 | length 504.7
  Top Layer w12: U2.2@820,2099 820,2067.14 824.39,2062.76 837,2062.76 840,2065.76 U2.3@840,2099
  Top Layer w20: 841,2062.76 843.9,2062.76 871.5,2035.16 922.68,2035.16 C4.2@928.83,2041.31 928.83,2025.87 976.7,1978 T1.1@1208.25,1978
V_BUCK_IN: C5.2 R4.1 R5.1 R10.1 T5.1 U2.5 U2.10 U2.11 U3.1 U3.7 | length 1606.5
  Top Layer w10: U2.5@885,2128 902,2128 920,2110 1032.33,2110 1032.33,2119.32 1032.33,2130 1032.33,2135.28 1035.78,2138.73 T5.1@1040.68,2133.83 ; R10.1@1379.41,2301.96 1387.13,2294.24 U3.1@1387.13,2230.32 ; U3.7@1440.28,2210.63 1468.63,2210.63 1506.51,2248.51 C5.2@1533.39,2248.51
  Top Layer w12: U2.11@820,2215 820,2280.83 ; U2.10@840,2215 R4.1@840,2253.66
  Top Layer w20: R4.1@840,2253.66 837,2256.66 840.58,2260.24 820,2280.83 819.64,2281.19 819.64,2361.3 831.35,2373 936.35,2373 990.17,2319.18 1090.87,2319.18 ; R5.1@1030.76,2200.24 1090.87,2260.36 1090.87,2319.18 ; R5.1@1040.68,2201.98 1040.68,2133.83 1040.68,2126.94 T5.1@1048.3,2119.32 ; R10.1@1379.41,2301.96 R10.1@1379.41,2319.18 ; 1411.94,2351.7 R10.1@1379.41,2319.18 ; 1419,2357 1509,2357 ; C5.2@1533.39,2248.51 1539.69,2254.81 1539.69,2273.29 1547,2280.59 ; 1090.87,2319.18 R10.1@1379.41,2319.18
V_PG: R10.2 T15.1 U3.8 | length 316
  Top Layer w10: U3.8@1440.28,2230.32 1440.28,2247.53 1459.41,2266.66 R10.2@1459.41,2301.96 1459.41,2319.18 R10.2@1466.61,2311.98 ; R10.2@1466.64,2312 v1(1505,2312)
  Bottom Layer w10: v1(1505,2312) 1501.28,2312 1500.32,2312.96 1594.81,2312.96 1602.43,2320.57 1602,2321 T15.1@1602,2380.72
V_PMU: C3.2 T2.1 U1.7 U2.13 | length 497.5
  Top Layer w12: 707,2250 U2.13@769,2188
  Top Layer w15: U1.7@476.69,2305.91 476.69,2265.73 490.98,2251.43 558.26,2251.43 570.07,2263.24 631.76,2263.24
  Top Layer w20: 631.76,2263.24 645,2250 C3.2@669.61,2250 707,2250 ; T2.1@653.39,2338 683.82,2307.57 683.82,2253 C3.2@658.39,2253
V_SOLAR: C2.2 P2.1 T4.1 U1.6 | length 254.6
  Top Layer w15: 489.31,2371 502.66,2357.66 U1.6@502.66,2305.94
  Top Layer w20: C2.2@335.95,2297.09 409.86,2371 489.31,2371
V_USB: C1.2 E1.2 P3.1 R1.2 T3.1 U1.8 | length 983.6
  Top Layer w15: 401.9,2296.61 430.28,2325 U1.8@451.69,2325
  Top Layer w20: T3.1@70,2393.89 97.24,2393.89 187.29,2303.84 209.5,2303.84 232.84,2280.5 232.84,2254.19 234.84,2252.19 234.16,2251.5 234.16,2189.16 225.15,2180.15 211.5,2171.29 ; P3.1@168.36,2171.29 211.5,2171.29 ; 401.9,2296.61 401.9,2131 ; R1.2@423.53,1988.98 401.9,2010.62 401.9,2131 ; 211.5,2171.29 E1.2@250.21,2143.59 294.8,2099 C1.2@333.82,2099 369.9,2099 401.9,2131
pads on no net: P3.2 P3.3 P3.4 U1.1 U3.4 U4.10 U4.11 U4.13 U4.14 U4.15 U4.16 U4.17 U4.23 U4.26 U4.27 U4.28 U4.29 U4.30 U4.31 U4.32 U4.33 U4.35 U4.36 U4.43 U4.44 U4.45 U4.46 U4.47 U4.48 U5.3 U5.8 U5.9 U5.13 U5.15 U5.16 U6.8 U6.9 U6.12 U6.18 U6.19 U7.4 U7.7 U7.8 U7.11 U7.13 U7.14 U7.15 U7.17 U7.18 U7.19 U7.20

## Polygon pours and split planes (outlines as drawn)
MCU_AVDD on Top Layer "TOP_V_AVDD" (solid, remove dead copper, pour order 70): 2209,1782 2209,1805 2280,1876 2319,1876 2319,1865 2316,1862 2280,1862 2242,1824 2242,1782
V_BUCK_IN on Top Layer "TOP_V-buck" (solid, remove dead copper, pour order 84): 902,2122 994,2122 1029,2157 1032.33,2157 1032.33,2092 931,2093
3.3V on Top Layer "TOP_3V3" (solid, remove dead copper, pour order 60): 1106.62,2194.85 1114.5,2202.72 1240.48,2202.72 1244.42,2198.79 1244.42,2080.68 1279.85,2045.24 1307.41,2045.24 1307.41,1990.13 1283.79,1966.5 1275.91,1966.5 1252.29,1998 1106.62,2171.23
3.3V on Top Layer "TOP_3V3" (solid, remove dead copper, pour order 30): 1291,1945 1262,1951.95 1262,2037.93 1291,2047.24 1535.43,2047.24 1637.8,2149.61 1783.46,2149.61 1830.71,2196.85 1830.71,2410 1858,2441 1961,2441 1961,2187.55 1890,2134.22 1890,2027 1952.76,1964.24 1952.76,1940.94 1905.51,1940.94
V_BUCK_IN on Top Layer "TOP_V-buck" (solid, remove dead copper, pour order 82): 1008.2,2186.98 1008,2107 1024,2091 1052,2091 1080,2119 1080,2252
V_BUCK_IN on Top Layer "TOP_BUCK" (solid, remove dead copper, pour order 66): 811.35,2395.64 807.41,2391.7 807.41,2277.53 819.22,2265.72 819.22,2261.78 827.18,2261.78 821.84,2267.11 821.84,2395.64 811.35,2395.64 807.41,2391.7
V_BUCK_IN on Top Layer "TOP_BUCK" (solid, remove dead copper, pour order 64): 1059.38,2310.01 1054.43,2309.82 1071.19,2297.21 1071.19,2253.91 1039.69,2222.41 1016.07,2222.41 1008.2,2214.54 1008.2,2186.98 1012.13,2183.04 1029.97,2183.04 1094.81,2251.94 1094.81,2285.4 1112.53,2311.98
V_BUCK_IN on Top Layer "TOP_BUCK" (solid, remove dead copper, pour order 62): 811.35,2348.39 821.84,2395.64 1523.94,2395.64 1568,2330.68 1568,2253.2 1559.23,2241.67 1491.1,2241.67 1539,2285.7 1539,2321.53 1512.13,2348.39 1421.58,2348.39 1401.9,2328.71 1401.9,2230.28 1397.96,2226.35 1354.65,2226.35 1342.84,2238.16 1342.84,2293.28 1331.03,2305.09 976.7,2305.09 938.16,2343.63
3.3V on Top Layer "TOP_3V3" (solid, remove dead copper, pour order 78): 2345,1345.88 2345,1280 2386,1239 2670,1239 2742,1311 2742,1536 2738,1540 2707,1540 2703,1536 2705,1534 2705,1308 2672,1275 2560,1275 2463,1372 2382,1372
3.3V on Top Layer "TOP_3V3" (solid, remove dead copper, pour order 86): 1960,1080 1960,1077 1961.34,1075.66 1960,1074.33 1960,840 1985,815 2015,815 2070,870 2070,1055
3.3V on Top Layer "TOP_3V3" (solid, remove dead copper, pour order 80): 2188,1173 2196,1181 2270,1255 2270,1328 2188,1410
3.3V on Top Layer "TOP_3V3" (solid, remove dead copper, pour order 72): 2059,1758 2196,1621 2196,1181 2070,1055 1982,1055 1960,1077 1960,1224 1970,1234 2134,1234 2154,1254 2153,1255 2153,1302 2123,1332 2069,1332 2059,1342
V_PMU on Top Layer "TOP_V_PMU" (solid, remove dead copper, pour order 38): 551.5,2255.42 586.94,2295.21 586.94,2386.89 606.62,2395.64 673.55,2395.64 701.11,2377.27 699,2229.97 650.54,2229.97 625.09,2255.42
3.3V on Top Layer "TOP_3V3" (solid, remove dead copper, pour order 50): 2057,2175.11 2074.8,2192.91 2409.45,2192.91 2417.32,2185.04 2417.32,2149.61 2428.4,2118.14 2439,2087 2441,2081.12 2414.81,2097 2269.14,2097 2212.6,2153.54 2070.87,2153.54 2057,2167.41
3.3V on Top Layer "TOP_3V3" (solid, remove dead copper, pour order 26): 2825.79,1866.14 2811.02,1875 2810.04,2016.73 2767.72,2059.06 2767.72,2125.98 2748.03,2145.67 2759.84,2157.48 2779.53,2157.48 2795.28,2141.73 2795.28,2098.43 2826.77,2082.68 2874.02,2082.68 2885.83,2070.87 2885.83,1877.95 2874.02,1866.14
3.3V on Top Layer "TOP_3V3" (solid, remove dead copper, pour order 52): 2511.81,2094.49 2531.12,2111.12 2584.98,2117 2639.76,2133.86 2755.91,2133.86 2755.91,2153.54 2759.84,2157.48 2624.02,2155.51 2610.24,2145.67 2536.42,2145.67 2503.94,2111.45 2500,2094.49 2505.91,2090.55
V_SOLAR on Top Layer "TOP_V_SOLAR" (solid, remove dead copper, pour order 76): 260,2403.49 308.89,2441 519,2441 537,2425 537,2382 511,2359 412,2362 412,2359 374,2321 376,2319 376,2267 295.36,2267 260,2315.63
GND on Top Layer "GPS_TOP_GND" (solid, remove dead copper, pour order 14): 0,1874.02 43.31,1917.32 1889.76,1917.32 1940.94,1866.14 1940.94,66.93 1874.02,0 39.37,0 0,39.37
GND on Bottom Layer "BOT_GND" (solid, remove dead copper, pour order 20): 0,78.74 78.74,0 2933.07,0 3011.81,78.74 3011.81,2322.83 2988.19,2322.83 3007.87,2322.83 2889.71,2441 94,2441 0,2347
no net on Internal Plane 13 (split plane): 173.67,1974.91 20.1,1974.91 20.1,2265.09 173.67,2265.09
no net on Internal Plane 13 (split plane): 2991.71,20.1 20.1,20.1 20.1,1969.81 176.22,1969.81 177.2,1970.01 178.02,1970.56 178.58,1971.39 178.77,1972.36 178.77,2267.64 178.58,2268.61 178.02,2269.44 177.2,2269.99 176.22,2270.19 20.1,2270.19 20.1,2420.9 2991.71,2420.9

## Silkscreen, mask and mechanical layers (free items; w line width, h text height)
Top Overlay:
  lines w8: 2649.88,1575.41 2668.41,1575.41 2702,1609 2709,1609
  lines w10: 0,1875 45,1920 1940,1920 1940,65 1875,0
  text "----> Child Saver <---- / Wei Ting Chien    / Srinath Shanmuganadhan / v1.0  ECEN 5833 LPEDT" at 515,116 h40
OUTLINE:
  the board outline again, w10

## Dimensions
0,2441 to 3011.81,2441 on Top Overlay